# Altium PCB ESP32.PcbDoc (part 2 of 3)
Units mm, origin at the board's own origin, x right, y up, seen from the top; angles counter-clockwise.
Board outline 71.12 x 25.4 mm, 4 copper layers (L1, L2, L3, L4), stack 1.604 mm thick; 64 components, 73 nets, 299 pads, 168 vias.
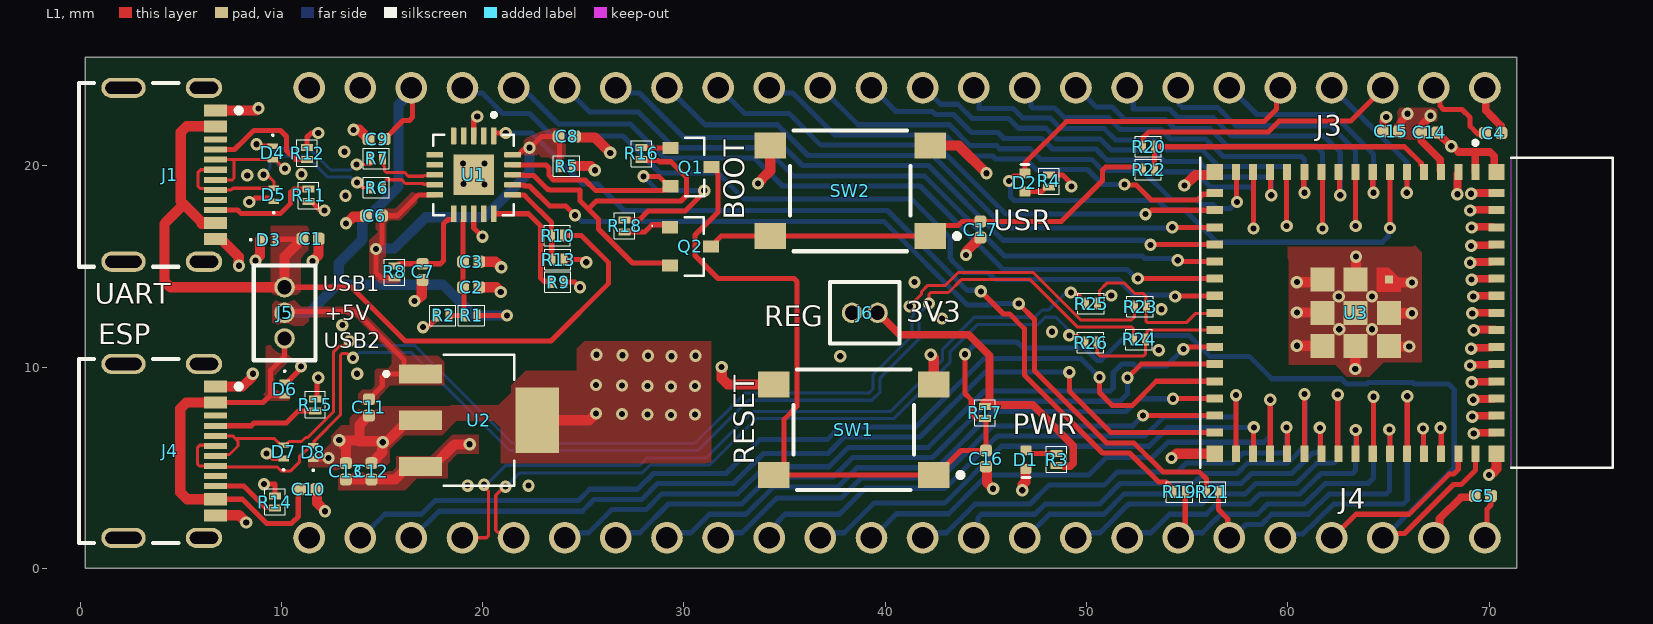
[diagram p0: L1 view]

## Via types
v1: diameter 0.61, hole 0.305, L1 to L4, tented both sides, 168 vias

## Nets (pads, with @x,y where several pads share a name; then routed paths per layer and width w, separated by ;. In a path a pad name is that pad's centre, name@x,y a point inside that pad or via, vN(x,y) a via of type N, cw(c..) or ccw(c..) an arc to the next point about the centre after c; other vN are vias at no path point) (continued)
+5V: (continued)
  L4 w0.508: J5.2@10.16,12.7 11.379,12.7 12.7,14.021 12.852,14.173 ; J3.22@16.51,23.876 16.51,23.731 15.824,23.045 15.824,18.974 14.021,17.17 14.021,16.339 12.852,15.17 12.852,14.173 ; v1(21.209,12.573) 19.558,12.573 18.034,14.097 12.929,14.097 12.852,14.173
+5V_VBUS1: C1.2 D3.2 J1.A4B9 J1.B4A9 J5.1 R10.2 | length 44.2
  L1 w0.254: D3.2@9.698,16.332 9.698,16.345 9.711,16.358 11.024,16.358 C1.2@11.049,16.383 ; J5.1@10.16,13.97 13.487,13.97 16.154,11.303 23.393,11.303 26.264,14.173 26.264,15.189 24.917,16.535 R10.2@24.024,16.535
  L1 w0.508: 5.158,18.086 4.191,17.12 4.191,14.268 4.489,13.97 J5.1@10.16,13.97 10.16,15.489 11.049,16.378 C1.2@11.049,16.383 ; 6.038,17.114 6.688,17.114 J1.B4A9@6.734,17.16 ; 6.038,17.206 5.004,18.24 5.004,21.673 5.301,21.971 6.723,21.971 J1.A4B9@6.734,21.96
+5V_VBUS2: C10.2 D6.2 J4.A4B9 J4.B4A9 J5.3 | length 20.7
  L1 w0.254: J4.B4A9@6.734,3.44 8.071,3.44 9.201,2.31 9.276,2.235 10.49,2.235 10.565,2.31 10.569,2.313 cw(c11.43,1.524) 10.74,2.467 ccw(c10.589,2.671) 10.795,2.523 10.843,2.589 10.843,3.858 C10.2@10.922,3.937 ; J4.A4B9@6.734,8.24 9.093,8.24 9.469,8.616 9.5,8.585 D6.2@10.16,8.585 ; 9.469,8.712 9.469,9.85 10.16,10.541 J5.3@10.16,11.43
  L1 w0.508: J4.B4A9@6.734,3.44 5.323,3.44 4.978,3.785 4.978,7.942 5.276,8.24 J4.A4B9@6.734,8.24
+VCC_FTDI: C2.2 C3.2 R1.2 R2.2 U1.12 | length 5.9
  L1 w0.254: R2.2@18.334,12.573 R1.2@19.131,12.573 19.083,12.621 19.083,13.913 C2.2@19.026,13.97 C3.2@19.026,15.24 19.026,17.306 19.058,17.338 U1.12@19.058,17.623
BTN_GPIO0: C17.2 Q2.3 R22.1 SW2.1 SW2.2 | length 23.4
  L1 w0.254: Q2.3@31.413,16.079 31.844,16.51 SW2.2@34.29,16.51 SW2.1@42.24,16.51 42.763,17.033 43.617,17.033 43.829,17.245 C17.2@44.729,17.245 48.767,17.245 50.8,19.279 50.8,19.79 50.949,19.939 52.738,19.939 52.786,19.891 R22.1@52.786,19.812
CHIP_PU: C16.2 J2.3 Q1.3 R17.1 SW1.1 SW1.2 U3.45 | length 79.5
  L1 w0.254: Q1.3@31.363,19.939 31.463,19.939 31.636,19.766 31.636,19.666 31.699,19.603 31.699,17.704 30.557,16.561 30.557,15.544 31.699,14.402 35.475,14.402 35.624,14.253 35.624,8.06 34.98,7.417 34.98,5.156 SW1.2@34.468,4.644 ; SW1.2@34.457,4.644 SW1.1@42.418,4.644 42.543,4.644 43.765,5.866 C16.2@45.009,5.866 45.009,7.399 R17.1@44.961,7.447 ; v1(43.967,10.643) 43.967,8.689 44.277,8.38 44.277,7.714 44.5,7.491 44.914,7.491 R17.1@44.958,7.447 ; J2.3@64.77,1.524 64.987,1.741 65.799,1.741 68.237,4.178 68.618,4.178 69.324,4.884 U3.45@69.324,5.7
  L4 w0.254: v1(43.967,10.643) 44.581,11.256 46.55,11.256 46.859,10.947 49.918,10.947 50.524,10.341 50.735,10.341 51.976,11.582 55.097,11.582 56.139,10.541 58.09,10.541 59.207,9.423 62.665,9.423 62.919,9.169 63.926,9.169 64.002,9.246 66.221,9.246 66.298,9.169 68.003,9.169 68.275,8.897 68.275,5.022 64.777,1.524 J2.3@64.77,1.524
CON1_USB_N: D4.2 J1.A7 J1.B7 R6.1 | length 11.7
  L1 w0.153: J1.A7@6.734,19.31 7.562,19.31 7.651,19.4 7.651,20.289 7.625,20.315 ; J1.B7@6.734,20.31 6.739,20.315 7.625,20.315 ; v1(10.185,19.863) 10.153,19.863 9.696,20.32 D4.2@9.576,20.32 9.571,20.315 7.625,20.315 ; v1(13.767,19.177) 14.021,18.923 R6.1@14.432,18.923
  L4 w0.153: v1(10.185,19.863) 10.062,19.863 9.918,20.007 9.88,20.007 9.79,20.097 9.79,20.407 9.88,20.497 11.247,20.497 12.301,19.443 13.449,19.443 13.715,19.177 v1(13.767,19.177)
CON1_USB_P: D5.2 J1.A6 J1.B6 R7.1 | length 13.3
  L1 w0.153: J1.A6@6.734,19.81 5.992,19.81 5.867,19.685 5.867,18.974 5.958,18.883 6.661,18.883 J1.B6@6.734,18.81 7.507,18.81 7.589,18.892 D5.2@9.627,18.892 9.627,19.228 9.296,19.558 v1(9.119,19.558) ; v1(13.741,20.066) 14.432,20.066
  L4 w0.153: v1(9.119,19.558) 9.12,19.558 9.434,19.872 9.434,20.555 9.733,20.853 11.395,20.853 12.448,19.8 13.423,19.8 13.69,20.066 v1(13.741,20.066)
CON2_USB_N: D7.2 J4.A7 J4.B7 R23.1 | length 60.1
  L1 w0.153: J4.A7@6.734,5.59 6.804,5.66 7.425,5.66 7.849,6.084 7.849,6.325 7.716,6.457 ; J4.B7@6.734,6.59 7.583,6.59 7.716,6.457 ; D7.2@9.989,6.116 9.648,6.457 7.716,6.457 ; D7.2@10.109,6.116 10.229,6.116 10.293,6.18 10.293,6.217 10.382,6.307 11.002,6.307 11.207,6.511 11.315,6.511 12.583,7.778 12.583,10.743 12.881,11.041 13.064,11.041 13.323,11.3 v1(13.382,11.3) ; v1(41.224,13.03) 41.224,13.044 41.814,13.634 41.814,13.758 42.12,14.065 42.995,14.065 43.638,14.708 47.354,14.708 49.717,12.345 52.239,12.345 52.38,12.485 R23.1@52.38,12.929
  L4 w0.153: v1(13.382,11.3) 13.505,11.3 13.725,11.08 16.635,11.08 21.504,6.21 30.548,6.21 33.049,8.712 39.191,8.712 39.395,8.915 39.395,9.621 41.332,11.558 41.332,12.506 41.411,12.585 41.411,12.72 41.224,12.907 v1(41.224,13.03)
CON2_USB_P: D8.2 J4.A6 J4.B6 R24.1 | length 61.5
  L1 w0.153: J4.A6@6.734,6.09 6.703,6.121 5.944,6.121 5.84,6.017 5.84,5.18 5.929,5.09 J4.B6@6.734,5.09 6.778,5.046 9.787,5.046 9.982,4.851 10.465,4.851 10.897,5.283 10.897,5.551 11.207,5.861 11.232,5.861 11.462,6.091 D8.2@11.582,6.091 11.632,6.14 11.632,6.323 12.939,7.631 12.939,10.595 13.029,10.685 13.246,10.685 13.466,10.465 v1(13.564,10.465) ; v1(42.173,13.166) 42.17,13.168 42.17,13.611 42.268,13.708 43.143,13.708 43.786,14.351 47.207,14.351 49.57,11.988 52.26,11.988 52.329,11.92 R24.1@52.329,11.379
  L4 w0.153: v1(13.564,10.465) 13.623,10.465 13.882,10.723 16.487,10.723 21.357,5.854 30.695,5.854 33.197,8.356 39.339,8.356 39.751,8.768 39.751,9.473 41.688,11.411 41.688,12.359 41.767,12.438 41.767,12.761 v1(42.173,13.166)
CON_ESP_USB_N: J2.21 R25.1 | length 38.6
  L1 w0.158: J2.21@19.05,1.524 20.196,1.524 20.289,1.617 20.289,3.847 20.066,4.07 v1(20.066,4.166) ; v1(49.225,13.716) 49.312,13.63 49.594,13.63 49.941,13.282 R25.1@49.941,13.157 49.941,13.05 R25.1@49.845,12.954
  L4 w0.158: v1(20.066,4.166) 20.181,4.166 21.146,5.131 27.801,5.131 28.165,5.495 31.121,5.495 33.43,7.805 40.284,7.805 42.853,10.374 42.853,10.9 44.433,12.48 47.435,12.48 47.795,12.84 48.136,12.84 48.228,12.933 48.228,12.956 48.308,13.035 48.867,13.594 48.907,13.594 48.943,13.63 49.139,13.63 v1(49.225,13.716)
CON_ESP_USB_P: J2.20 R26.1 | length 36.7
  L1 w0.158: v1(21.133,4.064) 21.082,4.064 20.65,3.632 20.65,1.902 20.757,1.795 21.319,1.795 J2.20@21.59,1.524 ; v1(49.149,11.582) 49.56,11.582 R26.1@49.916,11.227
  L4 w0.158: v1(21.133,4.064) 21.168,4.064 21.854,4.75 27.931,4.75 28.315,5.134 31.27,5.134 33.58,7.444 40.433,7.444 43.214,10.224 43.214,10.75 44.583,12.119 47.585,12.119 47.945,12.478 48.482,12.478 49.063,11.897 49.063,11.669 v1(49.149,11.582)
CON_GPIO0: J3.3 R20.1 | length 13.4
  L1 w0.254: R20.1@52.786,20.955 52.824,20.993 52.824,21.423 53.093,21.692 59.037,21.692 59.57,22.225 63.119,22.225 J3.3@64.77,23.876
DTR_FTDI: Q2.2 R16.1 U1.18 | length 19
  L1 w0.254: U1.18@21.493,19.558 21.501,19.55 22.03,19.55 22.062,19.518 22.541,19.518 23.22,18.839 23.274,18.839 23.317,18.796 24.841,18.796 24.841,18.293 ; 24.841,18.267 25.248,17.861 25.649,18.262 29.855,18.262 30.124,18.531 30.124,19.447 29.363,20.208 28.785,20.208 28.719,20.274 R16.1@27.889,20.274 ; 25.266,17.843 25.756,17.353 25.756,16.866 27.442,15.179 Q2.2@29.443,15.179
ESP_USB_N: R23.2 R25.2 U3.23 | length 8.3
  L1 w0.153: R25.2@50.541,13.157 50.637,13.253 50.637,13.463 50.645,13.471 50.645,13.807 51.011,14.173 51.887,14.173 52.397,13.663 52.823,13.663 52.96,13.526 52.96,13.225 52.98,13.206 R23.2@52.98,12.807 ; R23.2@52.954,12.807 52.954,12.304 53.047,12.211 54.96,12.211 55.423,12.675 56.349,12.675 U3.23@56.374,12.7